# Altium PCB x-IMU3-SA-IMU.PcbDoc
Units mm, origin at the board's own origin, x right, y up, seen from the top; angles counter-clockwise.
Board outline 13 x 12.5 mm, 4 copper layers (Top Layer, Int1 (GND), Int2 (PWR), Bottom Layer), stack 1.369 mm thick; 10 components, 14 nets, 58 pads, 8 vias.
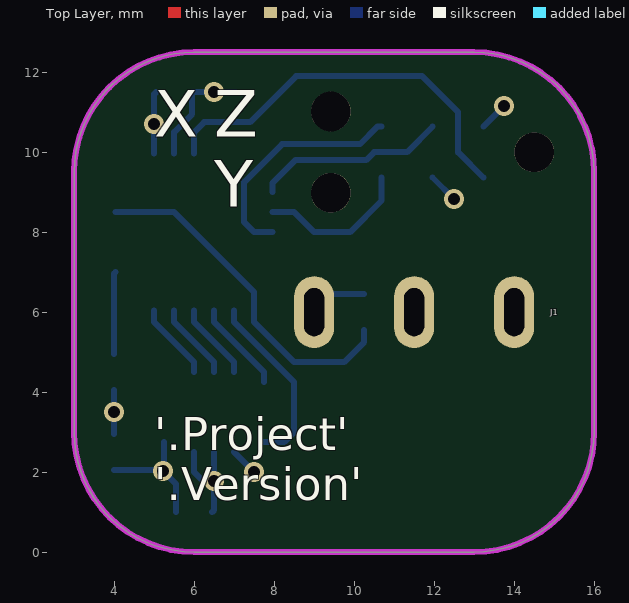
[diagram p0: Top Layer view]
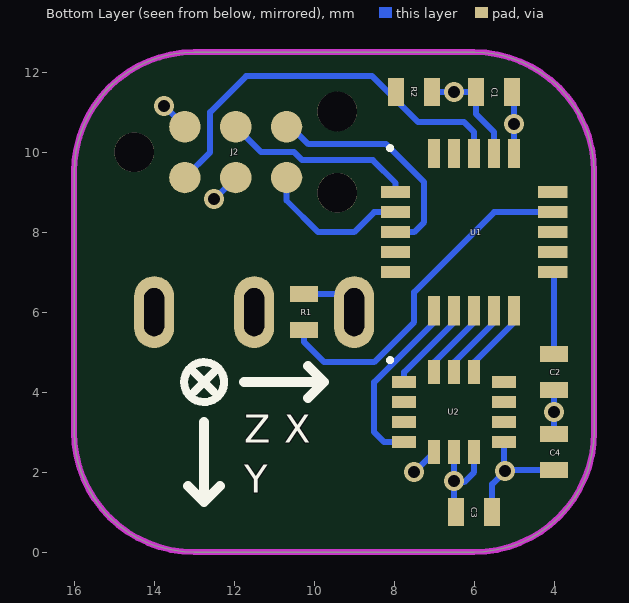
[diagram p1: Bottom Layer view, seen from below]
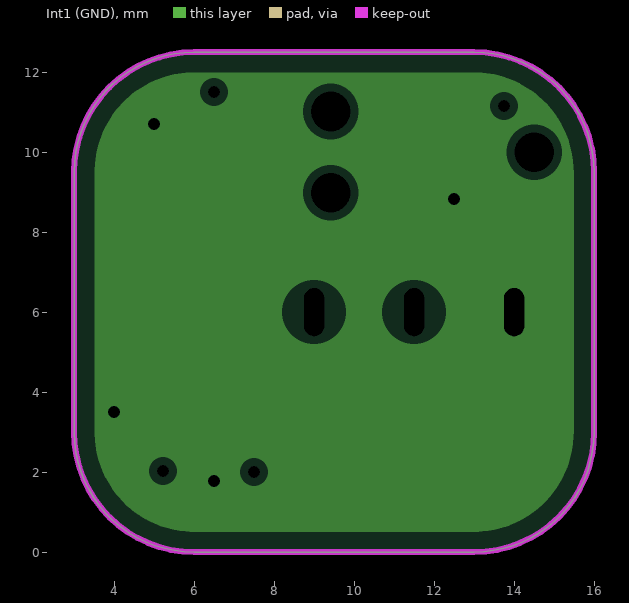
[diagram p2: Int1 (GND), clearances drawn from the general rule]
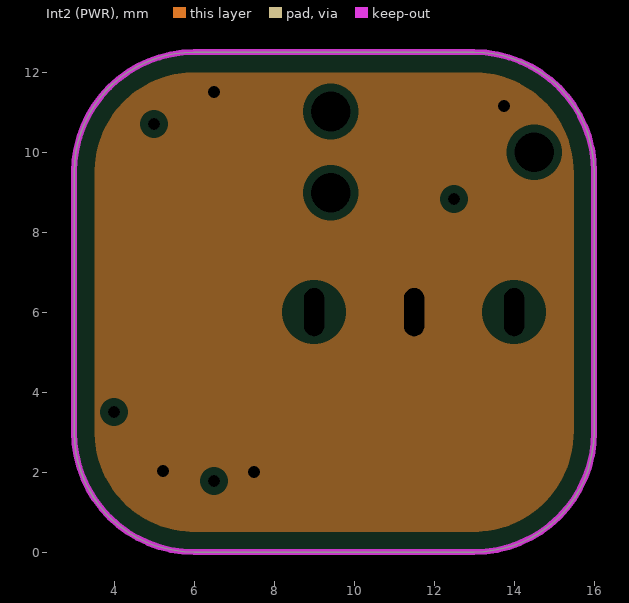
[diagram p3: Int2 (PWR), clearances drawn from the general rule]

## Layer stack, top to bottom
Top Solder: solder mask 0.0254, SM-001, Dk 4
Top Layer: signal copper 0.035
Dielectric 1: prepreg 0.1295, PP-017, Dk 4.3
Dielectric 2: prepreg 0.1295, PP-017, Dk 4.3
Int1 (GND): plane copper 0.035, net GND
Dielectric 3: core 0.7112, Core-039, Dk 4.8
Int2 (PWR): plane copper 0.035, net VDD
Dielectric 4: prepreg 0.1295, PP-017, Dk 4.3
Dielectric 5: prepreg 0.1295, PP-017, Dk 4.3
Bottom Layer: signal copper 0.035
Bottom Solder: solder mask 0.0254, SM-001, Dk 4

## Board outline
3,3 3,9.5 cw(c6,9.5) 6,12.5 13,12.5 cw(c13,9.5) 16,9.5 16,3 cw(c13,3) 13,0 6,0 cw(c6,3)

## Design rules (kind name [scope] priority, off if disabled: settings)
Clearance ClearanceInternal [OnMid] p1: gap=0.2 ignorepadtopadclearanceinfootprint=FALSE
Clearance [All] p2: gap=0.1 ignorepadtopadclearanceinfootprint=FALSE except(0: Arc-Hole Track-Hole SMDPad-Hole THPad-Hole Via-Hole Fill-Hole Poly-Hole Region-Hole Text-Hole)
DiffPairsRouting [All] p1: maxlimit=0.254 minlimit=0.1 mostfreqgap=0.1 toplayer_minwidth=0.1 toplayer_maxwidth=0.381 toplayer_prefwidth=0.1 bottomlayer_minwidth=0.1 bottomlayer_maxwidth=0.381 bottomlayer_prefwidth=0.1 maxuncoupledlength=12.7
HoleSize [All] p1: absolutevalues=TRUE maxlimit=10 minlimit=0.025 maxpercent=80.000 minpercent=20.000
MinimumSolderMaskSliver [All] p1: minsoldermaskwidth=0
PlaneClearance [All] p1: clearance=0.2
PlaneConnect [All] p1: planeconnectstyle=Direct reliefexpansion=0.508 reliefentries=4 reliefconductorwidth=0.254 reliefairgap=0.254
PolygonConnect [All] p1: thpad.connectstyle=Relief thpad.reliefconductorwidth=0.254 thpad.reliefentries=4 thpad.polygonreliefangle="90 Angle" thpad.airgapwidth=0.1 smdpad.connectstyle=Relief smdpad.reliefconductorwidth=0.254 smdpad.reliefentries=4 smdpad.polygonreliefangle="90 Angle" smdpad.airgapwidth=0.1 via.connectstyle=Direct via.reliefconductorwidth=0.254 via.reliefentries=4 via.polygonreliefangle="90 Angle" via.airgapwidth=0.254
RoutingVias [All] p1: holewidth=0.711 width=1.27 viastyle="Through Hole" minholewidth=0.15 minwidth=0.35 maxholewidth=0.711 maxwidth=1.27
SilkToSolderMaskClearance [IsPad] p1: minsilkscreentomaskgap=0.1 clearancetoexposedcopper=TRUE
SolderMaskExpansion [All] p1: expansion=0.102 istentingtop=FALSE
Width [All] p1: maxlimit=1 minlimit=0.05 preferedwidth=0.1
24 further rules are at their usual default settings.

## Components (designator, comment, footprint, x,y, rotation, side; value= is the part's Value field where it differs from the comment)
C1 "100nF" "Capacitor 0402" 5.5,11.5 r0 bottom
C2 "10uF" "Capacitor 0402" 4,4.5 r90 bottom
C3 "100nF" "Capacitor 0402" 6,1 r180 bottom
C4 "2.2uF" "Capacitor 0402" 4,2.5 r270 bottom
J1 "SP-3533-02" SP-3533-02 11.5,6 r180 top
J2 "DNP" "Tag Connect No Legs" 14.5,10 r180 bottom
R1 "470R" "Resistor 0402" 10.25,6 r270 bottom
R2 "10kR" "Resistor 0402" 7.5,11.5 r180 bottom
U1 "PIC32MM0064GPL020-I/ML" QFN-20 6,8 r180 bottom
U2 "ICM-45686" ICM-45686 6.5,3.5 r180 bottom

## Footprints (in the part's own frame and the unit in brackets; to place one, negate y for a bottom-side part, rotate by r counter-clockwise, add the part's x,y. Pads: shape width x height; smd on the part's side, far side on the other; paste and mask are expansions set on the pad)
"Capacitor 0402" [mm]
  rect 0.4x0.7 smd: 1(-0.45,0) 2(0.45,0)
  body extent -0.5,-0.25 0.5,0.25, height 0.48
ICM-45686 [mm]
  rect 0.6x0.3 smd mask+0.102: 1(-1.25,0.75)
  rect 0.6x0.3 smd: 2(-1.25,0.25) 3(-1.25,-0.25) 4(-1.25,-0.75) 8(1.25,-0.75) 9(1.25,-0.25) 10(1.25,0.25) 11(1.25,0.75)
  rect 0.3x0.6 smd: 5(-0.5,-1) 6(0,-1) 7(0.5,-1) 12(0.5,1) 13(0,1) 14(-0.5,1)
  silkscreen extent -1.65,1.25 -1.55,1.35, body extent -1.5,-1.25 1.5,1.25, height 0.81
QFN-20 [mm]
  rect 0.73x0.3 smd: 1(-1.965,1) 2(-1.965,0.5) 3(-1.965,0) 4(-1.965,-0.5) 5(-1.965,-1) 11(1.965,-1) 12(1.965,-0.5) 13(1.965,0) 14(1.965,0.5) 15(1.965,1)
  rect 0.3x0.73 smd: 6(-1,-1.965) 7(-0.5,-1.965) 8(0,-1.965) 9(0.5,-1.965) 10(1,-1.965) 16(1,1.965) 17(0.5,1.965) 18(0,1.965) 19(-0.5,1.965) 20(-1,1.965)
  silkscreen extent -2.15,2.05 -2.05,2.15, body extent -2.02,-2.02 2.02,2.02, height 0.8
"Resistor 0402" [mm]
  rect 0.4x0.7 smd: 1(-0.45,0) 2(0.45,0)
  body extent -0.5,-0.25 0.5,0.25, height 0.34
SP-3533-02 [mm]
  oval 1x1.8 hole 0.5 slot 1.2 at 90 deg: R(0,0) S(-2.5,0) T(2.5,0)
  body extent -21.85,-2.5 4.75,2.5, height 5
"Tag Connect No Legs" [mil]
  round 31 smd paste-99999: 1(50,-25) 2(50,25) 3(100,-25) 4(100,25) 5(150,-25) 6(150,25)
  round 39 hole 39 unplated: Pin(0,0) Pin(200,-40) Pin(200,40)

## Part data
C1 C2 C3 C4: library part Capacitor
J2: library part "MPLAB ICSP"
R1 R2: library part Resistor

## Via types
v1: diameter 0.5, hole 0.3, Top Layer to Bottom Layer, tented both sides, 8 vias

## Nets (pads, with @x,y where several pads share a name; then routed paths per layer and width w, separated by ;. In a path a pad name is that pad's centre, name@x,y a point inside that pad or via, vN(x,y) a via of type N, cw(c..) or ccw(c..) an arc to the next point about the centre after c; other vN are vias at no path point)
CS: U1.10 U2.12 | length 1.9
  Bottom Layer w0.15: U1.10 5,5.75 6,4.75 U2.12
Debug: J2.6 U1.3 | length 5.8
  Bottom Layer w0.15: U1.3 7.5,8 7.25,8.25 7.25,9.25 8.2,10.2 10.146,10.2 10.581,10.635 J2.6
GND: C1.1 C2.1 C3.1 C4.1 J1.S J2.3 U1.16 U2.6 U2.7 | length 6.1
  Bottom Layer w0.15: C4.1 C2.1 ; U1.16 5,11.45 C1.1 ; U2.7 6,2 6.25,1.75 6.475,1.75 v1(6.5,1.775) ; C3.1 6.5,1.05 v1(6.5,1.775) ; U2.6 v1(6.5,1.775) ; J2.3 v1(12.5,8.825)
  other v1: 4,3.5 5,10.707
INT: U1.6 U2.4 | length 4.5
  Bottom Layer w0.15: U1.6 7,5.75 8.5,4.25 8.5,3 8.25,2.75 U2.4
MCLR: J2.1 R2.1 U1.18 | length 10
  Bottom Layer w0.15: U1.18 6,10.5 6.25,10.75 7.4,10.75 8.55,11.9 11.7,11.9 12.6,11 12.6,9.995 J2.1
PGEC: J2.5 U1.2 | length 3.8
  Bottom Layer w0.15: U1.2 8.5,8.5 9,8 9.9,8 10.69,8.79 J2.5
PGED: J2.4 U1.1 | length 4.8
  Bottom Layer w0.15: U1.1 7.965,9.233 8.533,9.8 10.3,9.8 10.5,10 11.325,10 J2.4
SCK: U1.9 U2.13 | length 1.9
  Bottom Layer w0.15: U1.9 5.5,5.75 6.5,4.75 U2.13
SDI: U1.7 U2.1 | length 2.3
  Bottom Layer w0.15: U1.7 6.5,5.75 7.75,4.5 U2.1
SDO: U1.8 U2.14 | length 1.9
  Bottom Layer w0.15: U1.8 6,5.75 7,4.75 U2.14
TX: R1.2 U1.14 | length 8.7
  Bottom Layer w0.15: U1.14 5.5,8.5 7.5,6.5 7.5,5.75 8.5,4.75 9.75,4.75 10.25,5.25 R1.2
"TX R": J1.T R1.1 | length 1.4
  Bottom Layer w0.15: J1.T 9.45,6.45 R1.1
VCAP: C2.2 U1.11 | length 2.1
  Bottom Layer w0.15: C2.2 4,6.965 U1.11
VDD: C1.2 C3.2 C4.2 J1.R J2.2 R2.2 U1.17 U2.5 U2.8 | length 7.4
  Bottom Layer w0.15: C4.2 5.2,2.05 v1@5.25,2 ; U2.8 v1@5.25,2 ; U1.17 5.5,10.5 5.95,10.95 C1.2 R2.2 ; C3.2 5.55,1.7 v1@5.25,2 ; U2.5 v1(7.5,2) ; J2.2 v1(13.75,11.155)
  other v1: 5.225,2.025 6.5,11.5
pads on no net: J2.Pin U1.4 U1.5 U1.12 U1.13 U1.15 U1.19 U1.20 U2.2 U2.3 U2.9 U2.10 U2.11

## Polygon pours and split planes (outlines as drawn)
GND on Int1 (GND) (split plane): 6,11.99 13,11.99 13.016,11.991 13.217,11.982 13.433,11.954 13.645,11.907 13.852,11.842 14.053,11.758 14.246,11.658 14.429,11.541 14.602,11.409 14.762,11.262 14.909,11.102 15.041,10.929 15.158,10.746 15.258,10.553 15.342,10.352 15.407,10.145 15.454,9.933 15.482,9.717 15.491,9.516 15.49,9.5 15.49,3 15.491,2.984 15.482,2.783 15.454,2.567 15.407,2.355 15.342,2.148 15.258,1.947 15.158,1.754 15.041,1.571 14.909,1.398 14.762,1.238 14.602,1.091 14.429,0.959 14.246,0.842 14.053,0.742 13.852,0.658 13.645,0.593 13.433,0.546 13.217,0.518 13.016,0.509 13,0.51 6,0.51 5.984,0.509 5.783,0.518 5.567,0.546 5.355,0.593 5.148,0.658 4.947,0.742 4.754,0.842 4.571,0.959 4.398,1.091 4.238,1.238 4.091,1.398 3.959,1.571 3.842,1.754 3.742,1.947 3.658,2.148 3.593,2.355 3.546,2.567 3.518,2.783 3.509,2.984 3.51,3 3.51,9.5 3.509,9.516 3.518,9.717 3.546,9.933 3.593,10.145 3.658,10.352 3.742,10.553 3.842,10.746 3.959,10.929 4.091,11.102 4.238,11.262 4.398,11.409 4.571,11.541 4.754,11.658 4.947,11.758 5.148,11.842 5.355,11.907 5.567,11.954 5.783,11.982 5.984,11.991
VDD on Int2 (PWR) (split plane): 6,11.99 13,11.99 13.016,11.991 13.217,11.982 13.433,11.954 13.645,11.907 13.852,11.842 14.053,11.758 14.246,11.658 14.429,11.541 14.602,11.409 14.762,11.262 14.909,11.102 15.041,10.929 15.158,10.746 15.258,10.553 15.342,10.352 15.407,10.145 15.454,9.933 15.482,9.717 15.491,9.516 15.49,9.5 15.49,3 15.491,2.984 15.482,2.783 15.454,2.567 15.407,2.355 15.342,2.148 15.258,1.947 15.158,1.754 15.041,1.571 14.909,1.398 14.762,1.238 14.602,1.091 14.429,0.959 14.246,0.842 14.053,0.742 13.852,0.658 13.645,0.593 13.433,0.546 13.217,0.518 13.016,0.509 13,0.51 6,0.51 5.984,0.509 5.783,0.518 5.567,0.546 5.355,0.593 5.148,0.658 4.947,0.742 4.754,0.842 4.571,0.959 4.398,1.091 4.238,1.238 4.091,1.398 3.959,1.571 3.842,1.754 3.742,1.947 3.658,2.148 3.593,2.355 3.546,2.567 3.518,2.783 3.509,2.984 3.51,3 3.51,9.5 3.509,9.516 3.518,9.717 3.546,9.933 3.593,10.145 3.658,10.352 3.742,10.553 3.842,10.746 3.959,10.929 4.091,11.102 4.238,11.262 4.398,11.409 4.571,11.541 4.754,11.658 4.947,11.758 5.148,11.842 5.355,11.907 5.567,11.954 5.783,11.982 5.984,11.991

## Keep-outs
Keep-Out Layer:
  the board outline again, w0.15

## Silkscreen, mask and mechanical layers (free items; w line width, h text height)
Top Overlay:
  text "X" at 5,10 h2
  text "Z" at 6.5,10 h2
  text "Y" at 6.499,8.25 h2
  text "'.Project'" at 5,2.266 h1.4
  text "'.Version'" at 5,1.016 h1.4
Bottom Overlay:
  circle w0.2: c12.75,4.25 r0.5
  lines w0.2: 12.5,4 13,4.5 ; 12.5,4.5 13,4
  lines w0.25: 10.15,3.85 9.75,4.25 ; 10.15,4.65 9.75,4.25 ; 11.75,4.25 9.75,4.25 ; 12.35,1.65 12.75,1.25 ; 12.75,3.25 12.75,1.25 ; 13.15,1.65 12.75,1.25
  text "X" at 10.75,2.5 h1.2
  text "Z" at 11.75,2.5 h1.2
  text "Y" at 11.751,1.25 h1.2